# EAGLE board LCDuinoBackpack (EAGLE 6.1)
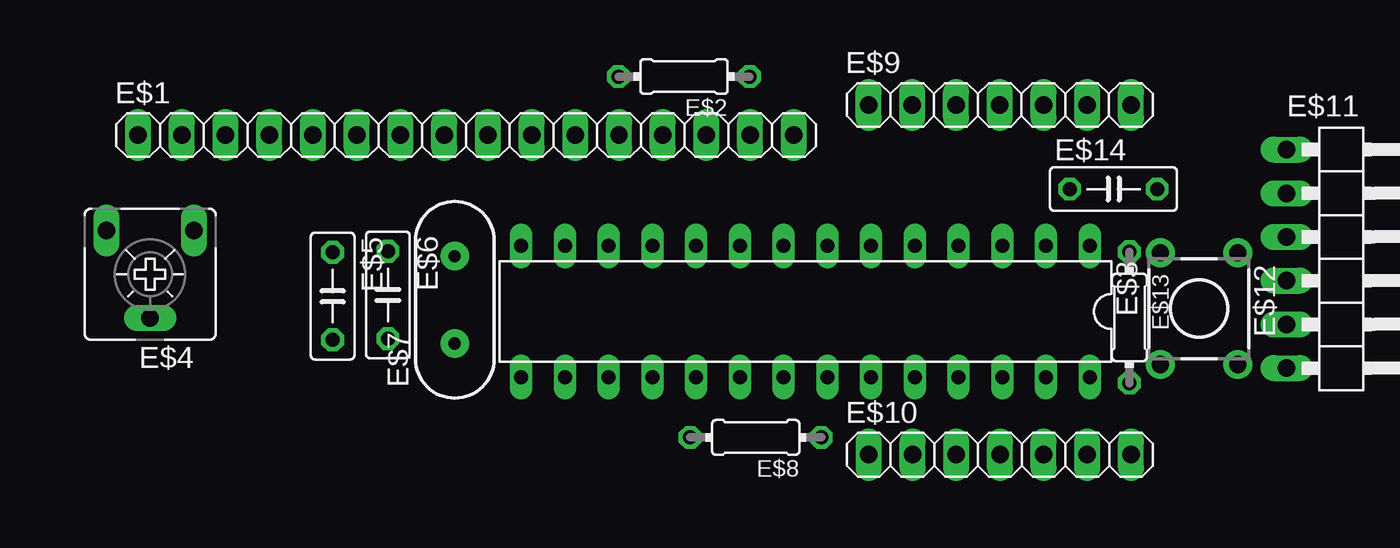
[diagram p0: board, top side]
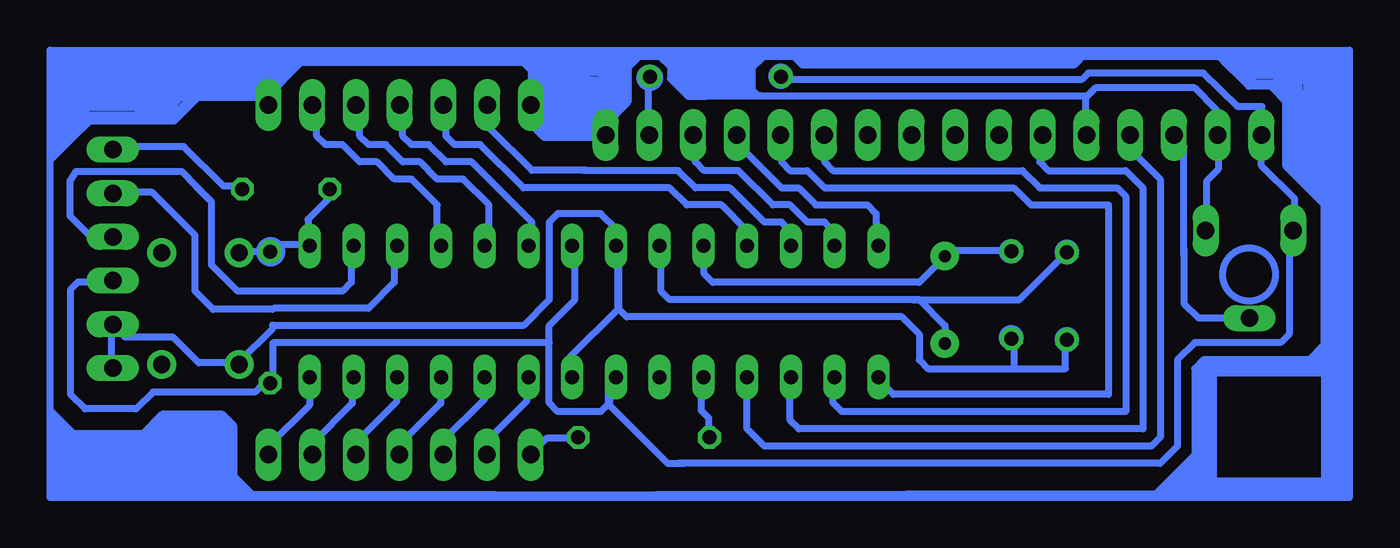
[diagram p1: board, bottom side, seen from below]

No outline drawn. Coordinates in mm, seen from the top.
Copper layers (1*16): Top 0.035mm / dielectric 1.5mm / Bottom 0.035mm
Design rules: minimum track width 10mil, minimum drill 24mil, track to track 8mil, track to pad 8mil, pad to pad 8mil, via to via 8mil, smd to smd 8mil, copper to edge 40mil, drill to drill 8mil, minimum pad ring 10mil, minimum via ring 8mil, stop-mask expansion 4mil, vias tented up to drill 0mil, thermal gap 10mil

## Footprints (pad centres in the part's own frame; a part is rotated, then mirrored left to right if it is on the bottom)
1X16 = drill 1.016 long: 1 -19.05,0; 2 -16.51,0; 3 -13.97,0; 4 -11.43,0; 5 -8.89,0; 6 -6.35,0; 7 -3.81,0; 8 -1.27,0; 9 1.27,0; 10 3.81,0; 11 6.35,0; 12 8.89,0; 13 11.43,0; 14 13.97,0; 15 16.51,0; 16 19.05,0
0204/7 = drill 0.813 octagon: 1 -3.81,0; 2 3.81,0
DIL28-3 = drill 0.813 long: 1 -16.51,-3.81; 2 -13.97,-3.81; 3 -11.43,-3.81; 4 -8.89,-3.81; 5 -6.35,-3.81; 6 -3.81,-3.81; 7 -1.27,-3.81; 8 1.27,-3.81; 9 3.81,-3.81; 10 6.35,-3.81; 11 8.89,-3.81; 12 11.43,-3.81; 13 13.97,-3.81; 14 16.51,-3.81; 15 16.51,3.81; 16 13.97,3.81; 17 11.43,3.81; 18 8.89,3.81; 19 6.35,3.81; 20 3.81,3.81; 21 1.27,3.81; 22 -1.27,3.81; 23 -3.81,3.81; 24 -6.35,3.81; 25 -8.89,3.81; 26 -11.43,3.81; 27 -13.97,3.81; 28 -16.51,3.81
CA6V = drill 1.016 long: A -2.54,-2.54; E 2.54,-2.54; S 0,2.54
C050-025X075 = drill 0.813 octagon: 1 -2.54,0; 2 2.54,0
HC49US = drill 0.7 pad 1.651: 1 -2.54,0; 2 2.54,0
1X07 = drill 1.016 long: 1 -7.62,0; 2 -5.08,0; 3 -2.54,0; 4 0,0; 5 2.54,0; 6 5.08,0; 7 7.62,0
1X06/90 = drill 1.016 long: 1 -6.35,-3.81; 2 -3.81,-3.81; 3 -1.27,-3.81; 4 1.27,-3.81; 5 3.81,-3.81; 6 6.35,-3.81
TL1105 = drill 1 pad 1.676: 1 -2.25,3.25; 2 2.25,3.25; 3 -2.25,-3.25; 4 2.25,-3.25

## Placement (x,y rotation side)
E$1  [1X16]  26.67,35.56 0 top
E$2  [0204/7]  39.34,38.96 180 top
E$3  [DIL28-3]  46.39,25.32 180 top
E$4  [CA6V]  8.32,27.47 180 top
E$5  [C050-025X075]  18.92,26.21 270 top
E$6  [C050-025X075]  22.13,26.28 270 top
E$7  [HC49US]  26.02,25.99 90 top
E$8  [0204/7]  43.5,18 180 top
E$9  [1X07]  57.68,37.32 0 top
E$10  [1X07]  57.69,17 0 top
E$11  [1X06/90]  78.16,28.37 270 top
E$12  [TL1105]  69.26,25.48 180 top
E$13  [0204/7]  65.22,24.97 270 top
E$14  [C050-025X075]  64.29,32.43 0 top

## Library data of the parts
E$1 E$9-E$11 = pinhead
E$2 E$5 E$6 E$8 E$13 E$14 = rcl
E$3 = 40xx
E$4 = pot
E$7 = SparkFun-FreqCtrl
E$12 = switch

## Tracks (layer width: path | path; a pad name or v marks a point on that pad's centre or on a via)
S$1
  Bottom 0.406: 5.69,29.98 5.69,31.86 7.62,33.79 7.62,35.58 7.57,35.63
S$3
  Bottom 0.406: 43.13,35.6 43.24,35.49
S$4
  Bottom 0.406: 10.79,29.98 10.79,32.92 10.1,33.61 10.1,35.58 10.14,35.63
S$5
  Bottom 0.406: 12.12,28.56 12.12,34.9 12.67,35.45
S$6
  Bottom 0.406: 7.62,35.72 7.62,37.15
S$7
  Bottom 0.406: 40.25,37.84 17.92,37.84 17.84,37.72
S$8
  Bottom 0.406: 10.24,35.79 10.24,37.05 11.49,38.3 17.25,38.3 17.85,37.71 17.85,35.52 17.71,35.39
S$9
  Bottom 0.406: 43.23,35.58 43.23,38.9 43.14,38.99
S$10
  Bottom 0.406: 7.59,37.21 9,37.21 10.99,39.16 17.68,39.16 18.06,38.79 35.42,38.79 35.58,38.95
S$11
  Bottom 0.406: 45.73,36.64 45.18,36.64 44.48,37.73 44.48,39.41 43.74,40.15 42.59,40.15 41.95,39.52 41.95,38.84 40.92,37.81 39.9,37.81
S$12
  Bottom 0.406: 4.09,39.31 9.27,39.31 9.82,39.86
S$13
  Bottom 0.406: 43.1,40.14 4.08,40.14
S$14
  Bottom 0.406: 7.82,39.3 9.27,39.3 10.04,40.07 9.69,40.07 9.22,39.6 4.19,39.6 4.12,39.53 4.12,40.1 4.1,40.12 4.1,40.03 4.26,39.87 9.08,39.87 9.17,39.95
S$15
  Bottom 0.406: 18.2,40.12 18.2,39.92 18.49,39.62 34.29,39.62 34.72,40.05 34.38,40.05 34.23,39.9 18.21,39.9 18.01,40.1
S$16
  Bottom 0.406: 36.71,37.83 36.85,37.83 37.19,38.17 37.19,39.49 36.61,40.06 37.08,40.06 37.41,39.73 37.41,38.07 37.42,38.06 40.73,38.06 41.78,39.11 41.78,39.75 41.96,39.94 37.81,39.94 37.55,39.68 37.55,38.44 37.66,38.33 40.67,38.33 41.54,39.2 41.54,39.66 37.81,39.66 37.77,39.62 37.77,38.66 37.87,38.57 40.65,38.57 41.3,39.22 41.3,39.37 41.31,39.38 37.89,39.38 37.83,39.33 37.85,39.33 38.07,39.11 38.07,38.96 38.03,38.92 40.69,38.92 40.84,39.07 40.52,39.07 40.48,39.11 38.24,39.11 38.11,39.24 39.23,39.24 39.3,39.16
S$17
  Bottom 0.406: 15,35.5 15,34.5 13.5,33 13.5,18 14,17.5 36.5,17.5 37.5,18.5 37.5,21.5
S$18
  Bottom 0.406: 20.5,35.5 20.5,34 20,33.5 15.5,33.5 14.5,32.5 14.5,18.5 34.5,18.5 35,19 35,21.5
S$19
  Bottom 0.406: 33,35.5 33,34 32.5,33.5 21.5,33.5 20.5,32.5 16,32.5 15.5,32 15.5,19.5 32,19.5 32.5,20 32.5,21.5
S$20
  Bottom 0.406: 35.5,35.5 35.5,34 35,33.5 34,33.5 33,32.5 22,32.5 21,31.5 16.5,31.5 16.5,20.5 29,20.5 30,21.5
S$21
  Bottom 0.406: 38,35.5 38,35 35.5,32.5 34.5,32.5 33.5,31.5 30.5,31.5 30,31 30,28.5
S$22
  Bottom 0.406: 32.5,29 32.5,30 33,30.5 34,30.5 35,31.5 36,31.5 38,33.5 40,33.5 40.5,34 40.5,35.5
S$23
  Bottom 0.406: 35,29 35,30 35.5,30.5 36.5,30.5 38.5,32.5 40.5,32.5 41.5,33.5 47,33.5
S$24
  Bottom 0.406: 37.5,29 37.5,30 39,31.5 41,31.5 42,32.5 50.5,32.5 53,35 54.5,35 55,35.5 55,37
S$25
  Bottom 0.406: 18.5,37.83 17.72,37.83 17.32,38.23
S$26
  Bottom 0.406: 45.73,35.45 45.73,36.56 45.77,36.6
S$27
  Bottom 0.406: 40,29 40,27.5 39.5,27 27.5,27 26,28.5
S$28
  Bottom 0.406: 42.5,29 42.5,26.5 42,26 27.5,26 26,24.5 26,23.5
S$29
  Bottom 0.406: 22,22 27,22 27.5,22.5 27.5,24 28.5,25 44.5,25 45,25.5 45,30 46,31 48.5,31 49,30.5 49,26 50.5,24.5 65,24.5 | 22,22 19,22 19,23.5 | 22,23.5 22,22
S$30
  Bottom 0.406: 47.81,21.38 47.81,22.65 44.95,25.52 44.95,28.6 45.22,28.88
S$31
  Bottom 0.406: 10.94,40.22 2.87,40.22 2.87,39.46 2.87,16.04 2.86,16.04
S$32
  Bottom 0.406: 9.34,40.23 72.36,40.23
S$33
  Bottom 0.406: 58,29 58,27 59.5,25.5 65,25.5
S$34
  Bottom 0.406: 60.5,29 60.5,27 61,26.5 65,26.5
S$35
  Bottom 0.406: 8.4,24.93 8.49,24.93
S$36
  Bottom 0.406: 12.12,28.91 12.12,25.78 11.28,24.94 8.45,24.94
S$37
  Bottom 0.406: 22.18,28.84 25.66,28.84 26.32,28.18
S$38
  Bottom 0.406: 27.88,26 21.66,26 18.93,28.74
S$39
  Bottom 0.406: 6,30 6,24 6.5,23.5 11.5,23.5 12.5,22.5 12.5,17.5 13.5,16.5 41.5,16.5
S$40
  Bottom 0.406: 62.74,29.2 64.53,29.2 65.17,28.56
S$41
  Bottom 0.406: 46,35.5 47,35.5 47,39.21 48,40.21
S$42
  Bottom 0.406: 39.71,17.91 39.71,19.12 40.16,19.56 40.16,21.44 40.05,21.55
S$43
  Bottom 0.406: 4.22,31.86 4.22,32.14 6.1,34.02 6.1,37.42 7.07,38.38 8.35,38.38 10.1,40.13 9.55,40.13 8.03,38.61 6.88,38.61 5.83,37.56 5.83,33.88 3.99,32.05 3.99,23.37 4.82,22.54
S$44
  Bottom 0.406: 8.08,39.03 6.84,39.03 5.55,37.74 5.55,33.93 3.85,32.23
S$45
  Bottom 0.406: 6.52,39.21 5.09,37.79 5.09,33.56
S$46
  Bottom 0.406: 5.42,33.66 5.42,38.66 5.97,39.21
S$47
  Bottom 0.406: 6.15,39.3 5.69,39.3 5,38.61
S$48
  Bottom 0.406: 5,39.44 5,37.56 5.14,37.42
S$49
  Bottom 0.406: 4.18,40.04 3.81,40.04 3.03,39.26 3.03,23.74 4.45,22.31 | 4.45,22.31 | 4.45,22.31 4.13,22.64 4.13,22.96 3.21,23.88 3.21,39.07 3.95,39.81 3.95,39.3 3.53,38.89 3.53,23.88 3.81,23.6 3.81,23.92 3.76,23.97 3.76,31.32 | 3.76,31.32 3.76,32.55 4.96,33.75 4.96,38.98 4.77,39.16 4.45,39.16 4.36,39.07 4.04,39.07 3.76,38.8 3.76,33.06 3.85,32.97 3.85,33.01 4.68,33.84 4.68,38.89 4.73,38.94 4.27,38.94 3.9,38.57 3.9,33.61 4.04,33.47 4.04,33.7 4.45,34.11 4.45,38.52 4.59,38.66 4.45,38.66 4.31,38.52 4.31,34.16 4.04,33.88 4.04,34.16 4.08,34.21 4.08,38.8 | 3.76,31.32 6.2,33.75 6.2,37.56 7.16,38.52
S$50
  Bottom 0.406: 4.5,22.5 11,22.5 11.5,22 11.5,17 13.75,14.72 71.92,14.63
S$51
  Bottom 0.406: 3.27,39.25 3.27,39.52 3.08,39.7 3.08,39.97 3.42,39.97 3.42,39.89 3.32,39.78
S$52
  Bottom 0.406: 47.36,17.95 49.15,17.95 50.12,16.99
S$53
  Bottom 0.406: 50.3,21.53 50.3,20.11 52.55,17.86 52.55,16.85 52.59,16.8
S$54
  Bottom 0.406: 52.78,21.4 52.78,20.2 55.21,17.77 55.21,17.08 55.03,16.9
S$55
  Bottom 0.406: 55.3,21.44 55.3,19.97 57.73,17.54 57.73,16.8 57.64,16.71
S$56
  Bottom 0.406: 57.87,21.44 57.87,20.06 60.17,17.77 60.17,16.99
S$57
  Bottom 0.406: 60.44,21.49 60.44,19.97 62.78,17.63 62.78,16.99
S$58
  Bottom 0.406: 62.92,21.44 62.92,19.88 65.26,17.54 65.26,16.94 65.17,16.85
S$59
  Bottom 0.406: 46.8,33.5 50,33.5 52.5,36 52.5,37.5
S$60
  Bottom 0.406: 50,29 50,30.5 53.5,34 55,34 56,35 57,35 57.5,35.5 57.5,37.5
S$61
  Bottom 0.406: 52.5,29 52.5,31.5 54,33 55.5,33 56.5,34 57.5,34 58.5,35 59.5,35 60,35.5 60,37.5
S$62
  Bottom 0.406: 55.5,29 55.5,31.5 57,33 58,33 59,34 60,34 61,35 62,35 62.5,35.5 62.5,37
S$63
  Bottom 0.406: 45.79,35.41 49.3,35.41 50.03,36.14 50.03,39.3 50.83,40.09 44.45,40.09 44.36,40 44.39,40 44.9,39.49
S$64
  Bottom 0.406: 44.42,39.77 44.42,37.48 45.41,36.49 46.78,36.49
S$65
  Bottom 0.406: 45.95,36.27 49.58,36.27 49.96,36.65
S$66
  Bottom 0.406: 45.95,35.98 49.55,35.98 49.68,36.11
S$67
  Bottom 0.406: 46.08,35.73 49.39,35.73 49.49,35.82
S$68
  Bottom 0.406: 44.99,39.84 44.99,37.38 45.57,36.81
S$69
  Bottom 0.406: 44.71,39.71 44.71,37.7 44.9,37.51
S$70
  Bottom 0.406: 45.15,39.87 50.22,39.87 | 50.31,39.87 50.22,39.87 | 50.22,39.87 49.8,39.45 49.8,36.97 49.36,36.52 46.24,36.52 45.31,37.45 45.31,39.61 45.34,39.65 49.74,39.65 49.77,39.61 49.68,39.61 49.52,39.45 49.52,37.1 49.23,36.81 46.36,36.81 45.66,37.51 45.66,39.39 49.2,39.39 49.3,39.3 49.3,37.29 49.1,37.1 46.52,37.1 45.92,37.7 45.92,39.07 46.01,39.17 49.14,39.17 49.17,39.13 49.17,37.45 49.01,37.29 46.78,37.29 46.2,37.86 46.2,38.72 46.17,38.75 48.85,38.75 49.01,38.91 46.81,38.91 46.4,38.5 46.4,37.96 46.78,37.57 48.98,37.57 48.98,38.5 48.94,38.53 46.84,38.53 46.65,38.34 46.65,38.05 46.71,37.99 48.66,37.99 48.75,37.89 48.75,38.37 48.82,38.43 47.41,38.43 47.26,38.27 47.92,38.27 47.96,38.24 48.44,38.24 48.53,38.15
S$71
  Bottom 0.406: 65.37,37.24 65.37,37.4 65.37,37.96 | 65.37,37.96 63.23,40.1 | 65.37,37.96 65.37,39.07 66.25,39.94
S$72
  Bottom 0.406: 65.36,38.43 65.26,38.43 63.7,39.99
S$73
  Bottom 0.406: 50.03,39.76 63.43,39.76 65.45,37.74 71.46,37.74 72.52,36.69
S$74
  Bottom 0.406: 50.93,40.05 63.97,40.05 66,38.02 71.66,38.02 72.38,37.29 72.38,37.79 72.31,37.87 72.31,39.97 72.19,40.08 64.08,40.08 64.01,40.01 64.35,40.01 64.73,39.62 72.38,39.62 72.42,39.66 72.42,39.78 72.27,39.93 65.12,39.93 64.85,39.66 64.85,39.43 65.08,39.2 65.23,39.2 66.11,38.32 71.58,38.32 72.08,37.83 72.08,39.16 71.92,39.32 71.92,39.4 71.96,39.43 65.46,39.43 65.31,39.28 65.58,39.28 66.23,38.63 71.58,38.63 71.89,38.32 71.89,39.16 71.77,39.28 65.73,39.28 65.58,39.13 66.07,39.13 66.23,38.97 71.81,38.97 71.85,39.01 70.74,39.01 70.43,38.71 65.16,38.71 65.16,38.52 65.73,37.94
S$80
  Bottom 0.406: 65.19,28.79 67.15,28.79 67.2,28.84
S$81
  Bottom 0.406: 2.94,21.95 10.65,21.95 11.38,21.21 11.38,16.85 13.63,14.6 44.43,14.6 73.62,14.6 77.84,14.6 77.84,14.83
S$82
  Bottom 0.406: 3.08,23.32 3.35,23.32 4.5,22.18 10.83,22.18 11.34,21.67
S$83
  Bottom 0.406: 2.85,16.39 2.85,14.83 3.17,14.51 73.71,14.51
S$84
  Bottom 0.406: 3.16,23.16 3.16,14.98 3.35,14.79 13.01,14.79 13.09,14.71
S$85
  Bottom 0.406: 3.4,23.05 3.4,15.22 3.48,15.14 12.85,15.14 12.93,15.06
S$86
  Bottom 0.406: 3.66,23.05 3.66,15.48 3.69,15.46
S$87
  Bottom 0.406: 3.96,15.46 12.45,15.46 12.48,15.43 12.4,15.43 11.31,16.52 11.31,15.83 11.39,15.75 11.58,15.75 11.63,15.7 11.63,15.8 11.58,15.86 11.58,15.91 11.52,15.96 11.47,15.96 11.13,15.62 11.13,21.62
S$88
  Bottom 0.406: 10.97,21.72 10.97,15.83 10.67,15.54
S$89
  Bottom 0.406: 10.65,15.8 10.65,21.88
S$90
  Bottom 0.406: 10.41,21.83 10.41,15.4 10.46,15.35
S$91
  Bottom 0.406: 3.8,22.41 3.9,22.41 4.06,22.25
S$92
  Bottom 0.406: 3.74,21.72 10.46,21.72 10.81,21.38
S$93
  Bottom 0.406: 3.96,21.83 3.96,15.51 4.04,15.43
S$94
  Bottom 0.406: 47.5,29 47.5,26 49,24.5 49,23.5 | 49,23.5 65,23.5 | 49,23.5 49,20 48.5,19.5 46,19.5 45.5,20 45.5,21.5
S$95
  Bottom 0.406: 41.14,16.48 42.1,16.48 45.54,19.93 45.54,21.15 45.42,21.27
S$96
  Bottom 0.406: 65.05,23.48 65.05,21.33 65.32,21.06 65.66,21.06 66.09,20.64 72.01,20.64 72.99,19.65 75.97,19.65 76.79,20.48 76.79,26.61 76.36,27.04 74.35,27.04 74.32,27.06
S$97
  Bottom 0.406: 65.08,24.52 65.08,24.32 67.07,22.34 69.36,22.34 70.85,23.83 73.64,23.83 74.45,24.63 74.45,21.92 74.41,21.88
S$98
  Bottom 0.406: 64.8,26.49 67.1,26.49 68.61,28.01 68.61,31.68 69.53,32.6
S$99
  Bottom 0.406: 65.08,25.44 68.52,25.44 69.58,26.49 69.58,29.75 72.06,32.23 74.53,32.23
S$100
  Bottom 0.406: 74.26,29.71 75.68,29.71 76.83,30.85 76.83,32.92 76.49,33.45 70.34,33.45 68.75,31.82
S$101
  Bottom 0.406: 66.69,32.6 67.92,32.6 70.22,34.9 74.21,34.9 74.44,34.66
S$102
  Bottom 0.406: 61.73,32.28 61.73,31.96 63.01,30.67 63.01,29.29 62.88,29.16
S$103
  Bottom 0.406: 73,14.5 78,14.5 78,40.5 2.5,40.5 2.5,14.5 73,14.5
S$104
  Bottom 0.406: 52.12,14.66 66.22,14.66 67.31,15.75 67.31,18.67 67.97,19.33 71.51,19.33 72.62,18.22 76.63,18.22 77.96,19.55 77.96,15.43 77.45,14.93 66.99,14.93 | 66.78,14.93 66.99,14.93 | 66.99,14.93 67.55,15.48 67.55,18.48 68.08,19.02 71.48,19.02 72.62,17.87 76.76,17.87 77.85,18.96 77.85,15.64 77.37,15.16 67.74,15.16 67.68,15.22 67.68,15.3 67.87,15.48 67.87,18.41 68.29,18.83 71.37,18.83 72.57,17.63 76.9,17.63 77.64,18.38 77.64,15.8 77.24,15.4 68.24,15.4 68.16,15.48 68.16,18.27 68.43,18.54 71.29,18.54 72.44,17.39 77.06,17.39 77.48,17.82 77.48,16.09 77.03,15.64 68.37,15.64 68.32,15.7 68.32,17.98 68.53,18.19 71.21,18.19 72.36,17.05 77,17.05 77.24,17.29 77.24,16.09 77.11,15.96 68.67,15.96 68.48,15.78 68.48,17.82 68.64,17.98 71.19,17.98 72.41,16.76 76.92,16.76 77.03,16.86 77.03,16.36 76.95,16.28 68.8,16.28 68.72,16.2 68.72,17.66 68.77,17.71 71.06,17.71 71.32,17.45 | 71.32,17.45 | 71.32,17.45 72.36,16.41 76.87,16.41 76.98,16.52 68.88,16.52 68.77,16.62 68.77,17.48 68.82,17.53 70.95,17.53 71.72,16.76 69.04,16.76 68.93,16.86 69.17,16.86 69.28,16.97 70.87,16.97 71,17.1 68.93,17.1 68.88,17.16 68.88,17.37 68.93,17.42 70.95,17.42 71.08,17.29
S$105
  Bottom 0.406: 71.73,16.62 71.46,16.62 71,17.08
S$106
  Bottom 0.406: 66.91,38.21 68.94,38.21 70.78,36.37 75.71,36.37 76.74,35.34 | 76.74,35.34 | 76.74,35.34 77.85,34.23 77.85,40.05 77.62,40.27 72.73,40.27 72.65,40.2 72.65,36.76 72.61,36.72 75.78,36.72 77.66,34.84 77.66,39.78 77.39,40.05 72.95,40.05 72.8,39.89 72.8,37.37 73.03,37.14 75.78,37.14 77.43,35.49 77.43,39.85 77.47,39.89 73.15,39.89 72.99,39.74 72.99,37.14 72.84,36.98 72.84,39.2 73.22,39.59 77.24,39.59 77.31,39.66 77.31,36.22 77.12,36.03 77.08,36.03 75.67,37.44 73.3,37.44 73.22,37.37 73.22,39.16 73.41,39.36 77.05,39.36 77.16,39.24 77.16,36.53 77.01,36.37 77.01,36.45 75.82,37.63 73.3,37.63 73.26,37.6 73.26,37.83 | 73.26,38.52 73.26,38.86 73.45,39.05 76.82,39.05 76.97,39.2 76.97,36.56 77.08,36.45 77.08,36.76 75.9,37.94 73.38,37.94 73.26,37.83 | 73.26,37.83 73.26,38.52 | 73.26,38.52 73.61,38.86 77.12,38.86 77.24,38.74 77.24,38.09 76.55,37.41 76.55,38.63 76.63,38.71 76.63,37.94 76.44,37.75 76.44,38.09 76.13,38.4 76.13,38.67 76.2,38.74 76.2,37.94 75.94,37.67 75.94,38.13 76.01,38.21 73.34,38.21 73.11,37.98 73.11,38.13 73.57,38.59 76.28,38.59 76.44,38.44 70.66,38.44 69.78,37.56 70.01,37.56 70.93,36.64 72.34,36.64 72.42,36.72
S$107
  Bottom 0.406: 72,36.83 | 72,36.83 71.23,37.6
S$108
  Bottom 0.406: 70.55,37.6 | 70.55,37.6 71.39,36.76
S$109
  Bottom 0.406: 71.85,36.76 71.73,36.76 70.97,37.52
(copper drawn outside any net)
  shapes: Bottom circle x8